# Altium PCB PrototypeV3.PcbDoc
Units mm, origin at the board's own origin, x right, y up, seen from the top; angles counter-clockwise.
Board outline 15.42 x 17.65 mm, 2 copper layers (Top Layer, Bottom Layer); 18 components, 39 nets, 67 pads, 5 vias.
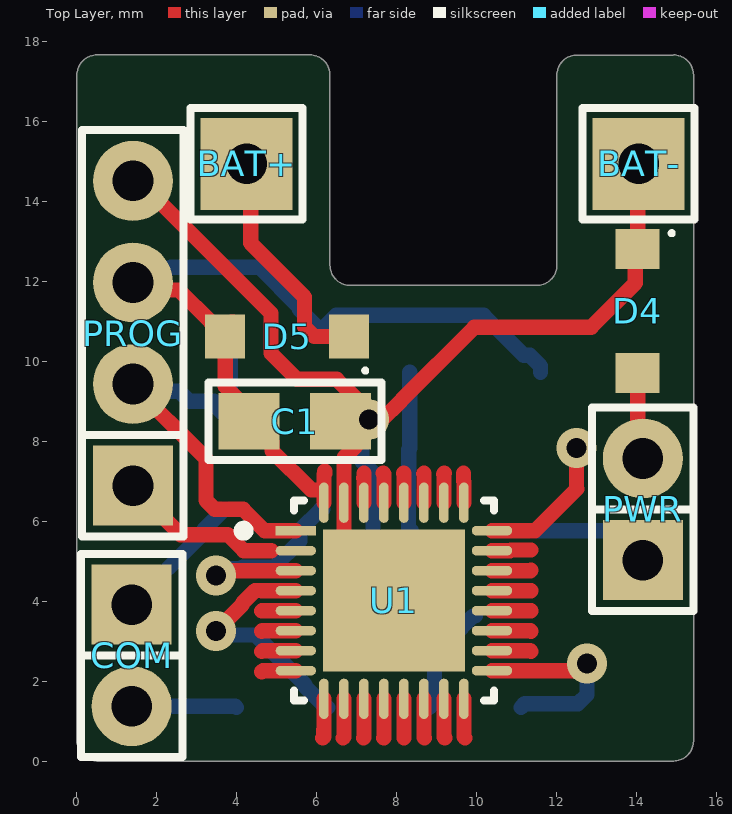
[diagram p0: Top Layer view]
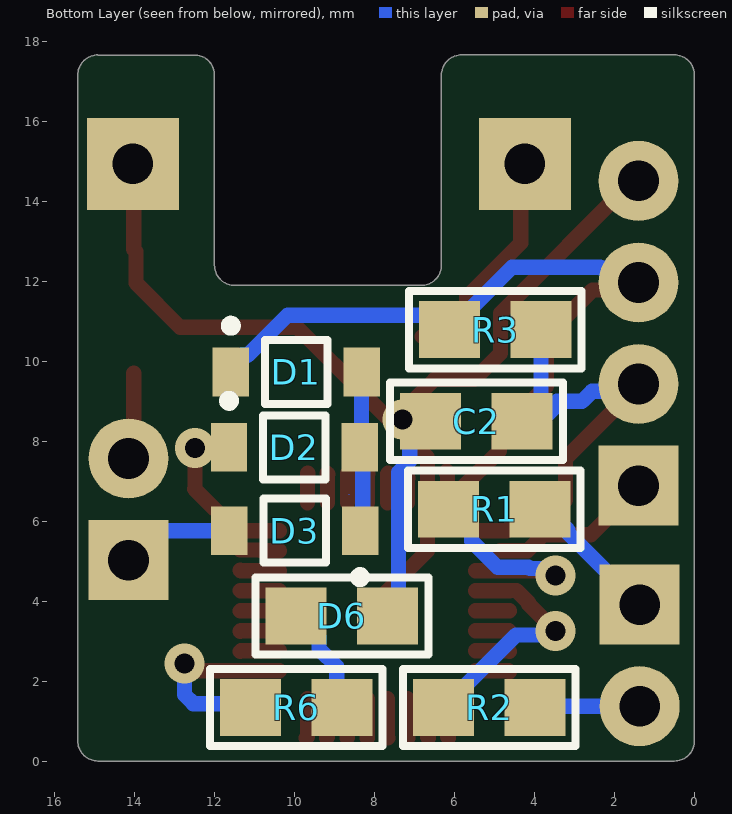
[diagram p1: Bottom Layer view, seen from below]
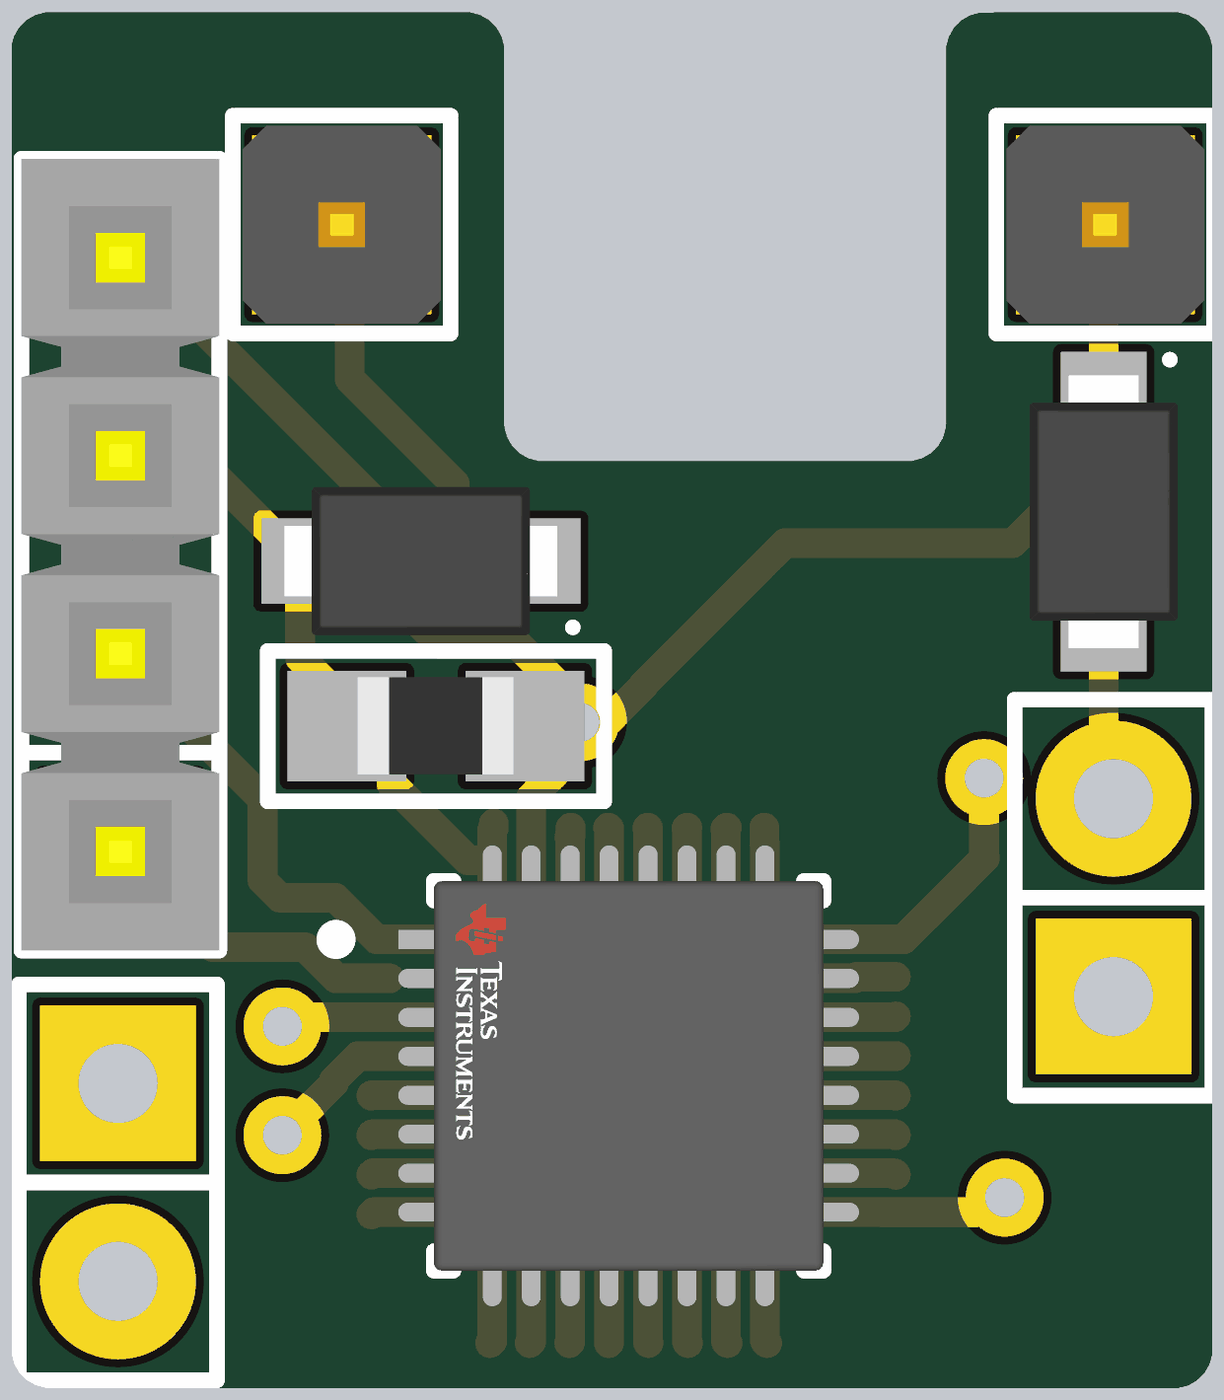
[diagram p2: 3D render of the assembled board from above, using the file's embedded part models]
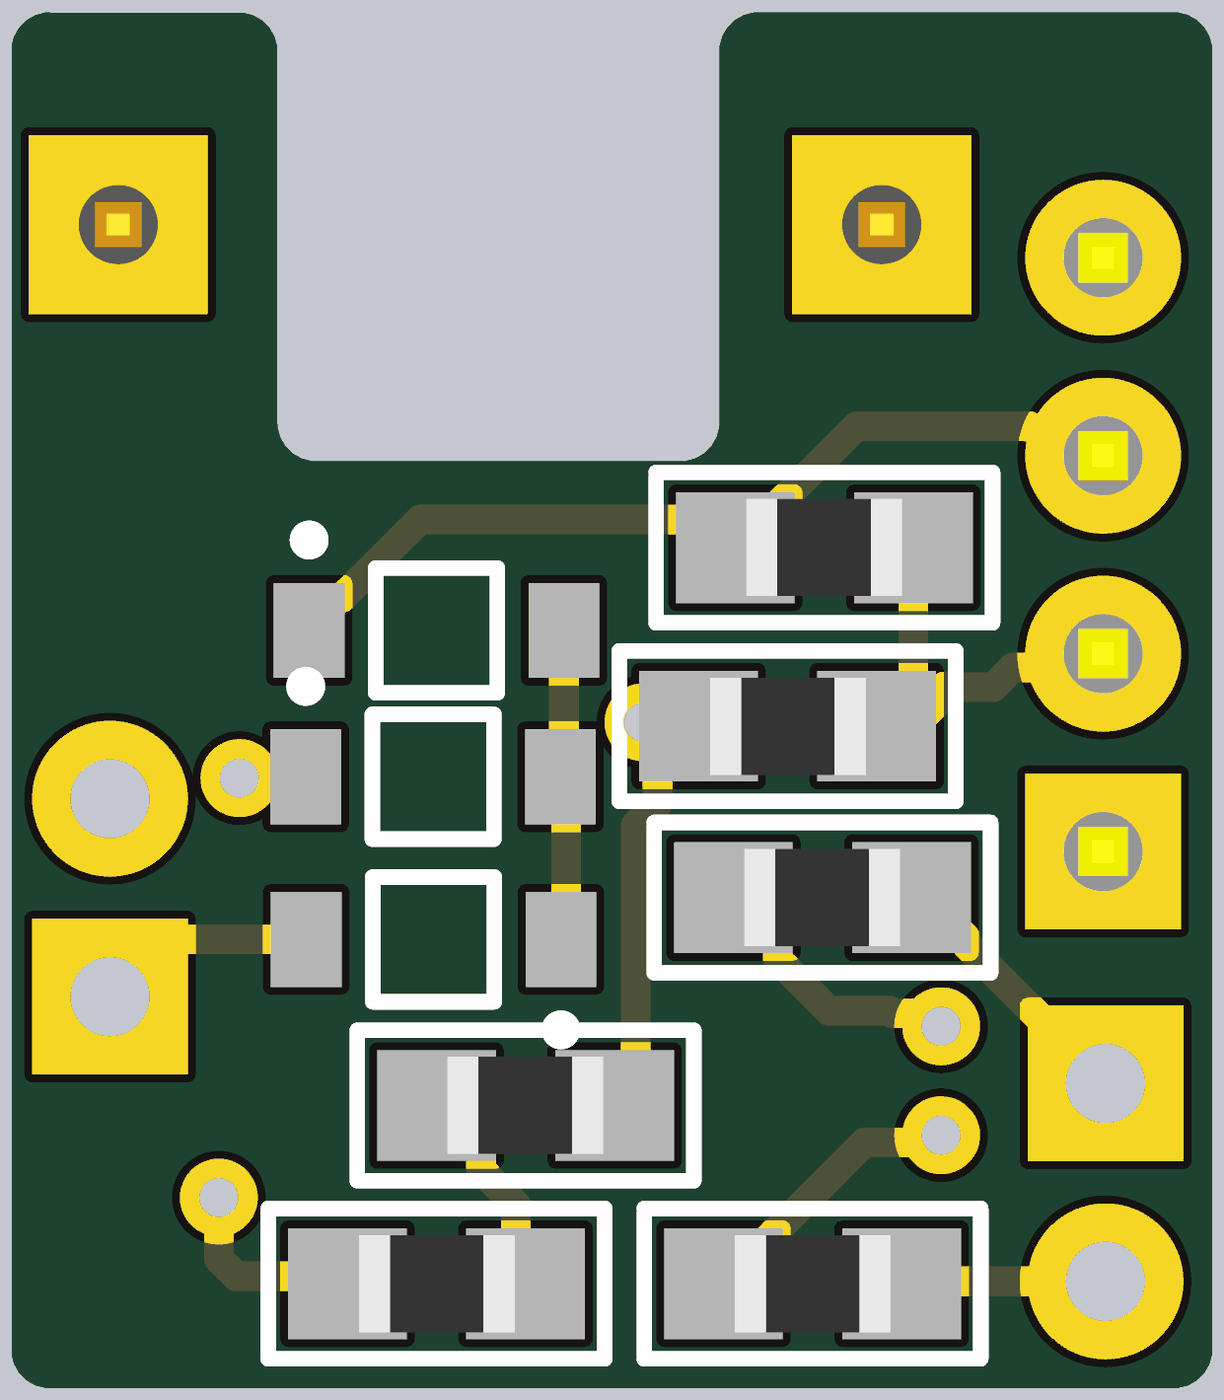
[diagram p3: 3D render of the assembled board from below, using the file's embedded part models]

## Layer stack, top to bottom
Top Solder: solder mask 0.0102, Solder Resist, Dk 3.5
Top Layer: signal copper 0.0356
Dielectric 1: dielectric 0.32, FR-4, Dk 4.8
Bottom Layer: signal copper 0.0356
Bottom Solder: solder mask 0.0102, Solder Resist, Dk 3.5

## Board outline
0,0.5 ccw(c0.5,0.5) 0.5,0 14.915,0 ccw(c14.915,0.5) 15.415,0.5 15.415,17.153 ccw(c14.915,17.153) 14.915,17.653 14.912,17.65 12.5,17.65 ccw(c12.5,17.15) 12,17.15 12,12.394 cw(c11.5,12.394) 11.5,11.894 6.826,11.894 cw(c6.826,12.394) 6.326,12.394 6.326,17.153 ccw(c5.826,17.153) 5.826,17.653 0.5,17.653 ccw(c0.5,17.153) 0,17.153

## Design rules (kind name [scope] priority, off if disabled: settings)
Clearance [All] p1: gap=0.1 ignorepadtopadclearanceinfootprint=TRUE
PolygonConnect [All] p1: connectstyle=Relief reliefconductorwidth=0.254 reliefentries=4 polygonreliefangle="90 Angle" airgapwidth=0.254
RoutingVias [All] p1: holewidth=0.711 width=1.27 viastyle="Through Hole" minholewidth=0.711 minwidth=1.27 maxholewidth=0.711 maxwidth=1.27
SolderMaskExpansion [All] p1: expansion=0.102 istentingtop=FALSE
Width [All] p1: maxlimit=0.5 minlimit=0.3 preferedwidth=0.5
30 further rules are at their usual default settings.

## Components (designator, comment, footprint, x,y, rotation, side; value= is the part's Value field where it differs from the comment)
BAT+ "TP" TPTH 4.242,14.929 r90 top
BAT- "TP" TPTH 14.042,14.929 r90 top
C1 "100nF" 0805 5.451,8.494 r0 top
C2 "4.7nF" 0805 5.451,8.494 r0 bottom
COM "CON2" SIP2 1.37,2.64 r270 top
D1 "1N4148WXHE3-TP" ONSC-SOD-123-2-425-04_V 9.957,9.722 r180 bottom
D2 "1N4148WXHE3-TP" ONSC-SOD-123-2-425-04_V 10.001,7.844 r180 bottom
D3 "1N4148WXHE3-TP" ONSC-SOD-123-2-425-04_V 9.995,5.757 r0 bottom
D4 "BAS100AS" SODFL350X110-2N 14.021,11.246 r270 top
D5 "BAS100AS" SODFL350X110-2N 5.258,10.611 r180 top
D6 "LED" 0805 8.814,3.626 r180 bottom
PROG "CON4" SIP4 1.401,10.694 r90 top
PWR "CON2" SIP2 14.148,6.293 r90 top
R1 "100" 0805 5.004,6.293 r180 bottom
R2 "100" 0805 5.131,1.34 r0 bottom
R3 "47k" 0805 4.979,10.784 r180 bottom
R6 "2k2" 0805 9.957,1.34 r0 bottom
U1 "MSP430FR2476TRHBR" FP-RHB0032E-IPC_A 7.925,4.007 r0 top

## Footprints (in the part's own frame and the unit in brackets; to place one, negate y for a bottom-side part, rotate by r counter-clockwise, add the part's x,y. Pads: shape width x height; smd on the part's side, far side on the other; paste and mask are expansions set on the pad)
0805 [mil] "Pasivo 0805"
  rect 60x56 smd: 1(-45,0) 2(45,0)
  silkscreen extent -85,-38 85,38, body extent -40,-24 39,25, height 15
FP-RHB0032E-IPC_A [mm]
  rect 1.01x0.242 smd paste+0 mask+0: 1(-2.451,1.75)
  rrect100% 1.01x0.242 smd paste+0 mask+0: 2(-2.451,1.25) 3(-2.451,0.75) 4(-2.451,0.25) 5(-2.451,-0.25) 6(-2.451,-0.75) 7(-2.451,-1.25) 8(-2.451,-1.75) 17(2.451,-1.75) 18(2.451,-1.25) 19(2.451,-0.75) 20(2.451,-0.25) 21(2.451,0.25) 22(2.451,0.75) 23(2.451,1.25) 24(2.451,1.75)
  rrect100% 0.242x1.01 smd paste+0 mask+0: 9(-1.75,-2.451) 10(-1.25,-2.451) 11(-0.75,-2.451) 12(-0.25,-2.451) 13(0.25,-2.451) 14(0.75,-2.451) 15(1.25,-2.451) 16(1.75,-2.451) 25(1.75,2.451) 26(1.25,2.451) 27(0.75,2.451) 28(0.25,2.451) 29(-0.25,2.451) 30(-0.75,2.451) 31(-1.25,2.451) 32(-1.75,2.451)
  rect 3.55x3.55 smd paste-1000 mask+0: 33(0,0)
  silkscreen extent -3.88,-2.5 2.5,2.5, body extent -3.46,-3.46 3.46,3.46, height 0.25
ONSC-SOD-123-2-425-04_V [mm] "SOD, 2-Leads, Body 2.69x1.6mm"
  rect 0.91x1.22 smd: 1(-1.635,0) 2(1.635,0)
  silkscreen extent -1.76,-0.8 0.78,1.28, body extent -1.35,-0.8 1.35,0.8, height 1.35
SIP2 [mm]
  rect 2x2 hole 1.016: 1(-1.27,0)
  round 2 hole 1.016: 2(1.27,0)
  silkscreen extent -2.54,-1.27 2.54,1.27
SIP4 [mm]
  rect 2x2 hole 1.016: 1(-3.81,0)
  round 2 hole 1.016: 2(-1.27,0) 3(1.27,0) 4(3.81,0)
  silkscreen extent -5.08,-1.27 5.08,1.27, body extent -5.08,-1.27 5.08,1.27, height 8.38
SODFL350X110-2N [mm] "SODFL, 2-Leads, Body 1.70x3.50mm, IPC Medium Density"
  rect 1x1.1 smd: 1(-1.55,0) 2(1.55,0)
  silkscreen extent -2,0.8 -1.9,0.9, body extent -1.75,-0.95 1.75,0.95, height 1.1
TPTH [mm]
  rect 2.3x2.3 hole 1.016: 1(0,0)
  silkscreen extent -1.4,-1.4 1.4,1.4, body extent -1.27,-1.27 1.27,1.27, height 6.04

## Part data
C1 C2: library part CAP
D1 D2 D3: library part CMP-0895-00001-2, "Switching Diode, 2-Pin SOD-123, Pb-Free, Tape and Reel", Manufacturer="On Semiconductor", PartNumber=MMSD4148T1G, ComponentLink1Description="Manufacturer URL", ComponentLink1URL=http://www.onsemi.com/, ComponentLink2Description=Datasheet, ComponentLink2URL=http://www.onsemi.com/pub_link/Collateral/MMSD4148T1-D.PDF, ComponentLink3Description="Package Specification", ComponentLink3URL=http://www.onsemi.com/pub_link/Collateral/425-04.PDF, Configuration=Single, DatasheetVersion="Rev. 11", IF Max (A)=0.2, Mounting Technology="Surface Mount", PackageDescription="2-Pin SOD, Body 1.6 x 2.69 mm", PackageReference=SOD-123-2-425-04, PackageVersion="Rev. G, 10/2009", Packing="Tape and Reel", RoHS=TRUE, trr Max (ns)=4
D4 D5: library part "DIODO SCHOTTKY"
R1 R2 R3 R6: library part RES
U1: library part CMP-04869-000099-1, "IC MCU 16BIT 64.5KB FRAM 32VQFN"

## Via types
v1: diameter 1, hole 0.5, Top Layer to Bottom Layer, 5 vias

## Nets (pads, with @x,y where several pads share a name; then routed paths per layer and width w, separated by ;. In a path a pad name is that pad's centre, name@x,y a point inside that pad or via, vN(x,y) a via of type N, cw(c..) or ccw(c..) an arc to the next point about the centre after c; other vN are vias at no path point)
Base_Detect: D2.1 U1.24 | length 3.6
  Top Layer w0.381: U1.24 11.453,5.757 12.497,6.801 ; 12.487,6.811 v1(12.487,7.827)
DVCC: C1.1 D1.1 D5.2 PROG.3 R3.1 U1.32 | length 21.5
  Top Layer w0.381: PROG.3@1.321,12.008 1.556,11.773 2.546,11.773 3.348,10.971 3.398,10.971 3.708,10.661 D5.2 3.708,9.367 C1.1@4.623,8.452 ; D5.2@3.856,10.971 D5.2@3.906,10.971 ; C1.1@3.975,8.701 C1.1@4.026,8.701 ; C1.1 4.358,8.494 4.879,7.974 4.879,7.754 5.86,6.773 6.105,6.773 U1.32@6.175,6.704 ; U1.32 U1.32@6.175,6.704 ; 6.194,7.244 6.194,7.187 6.175,7.168 U1.32@6.175,6.704
  Bottom Layer w0.381: PROG.3@1.759,12.008 1.321,12.008 1.63,12.318 2.327,12.318 2.353,12.344 4.562,12.344 5.55,11.356 5.55,11.305 6.071,10.784 R3.1 6.482,11.144 10.17,11.144 11.172,10.142 11.327,10.142 11.592,9.877 D1.1
DVSS: BAT-.1 C1.2 C2.2 D4.1 D6.2 PROG.4 U1.31 U1.33 | length 32.8
  Top Layer w0.381: PROG.4@1.321,14.548 1.497,14.548 4.851,11.194 4.851,10.194 5.501,9.544 6.494,9.544 6.972,9.066 6.972,9.015 C1.2@7.146,8.841 ; C1.2 7.594,8.494 8.115,9.015 8.115,9.024 9.936,10.844 12.857,10.844 13.96,11.948 13.96,12.736 D4.1 14.021,14.908 BAT-.1 ; U1.33@7.101,3.644 7.562,3.644 U1.33 6.675,5.257 U1.31 6.675,7.583 6.972,7.881 6.972,7.974 C1.2@7.146,8.148
  Bottom Layer w0.381: PROG.4@1.321,14.421 PROG.4@1.321,14.548 ; C2.2 6.837,8.251 6.842,8.251 7.119,7.974 7.119,7.501 7.401,7.219 7.401,3.896 D6.2 7.119,3.626 D6.2@7.101,3.644 ; C2.2@6.847,8.498 7.005,8.498 C2.2@7.101,8.594
  other v1: 7.301,8.544
GNDext: D4.2 PWR.2 | length 2.1
  Top Layer w0.381: PWR.2@14.021,7.563 D4.2
NC: U1.20 | length 1
  Top Layer w0.381: U1.20 11.35,3.757 11.354,3.753
NetBAT+_1: BAT+.1 D5.1 | length 5.9
  Top Layer w0.381: BAT+.1 4.343,14.828 4.343,12.952 5.693,11.602 5.693,10.852 5.934,10.611 D5.1
NetD1_2: D1.2 D2.2 D3.1 | length 4
  Bottom Layer w0.381: D1.2 8.322,7.817 8.295,7.79 8.295,6.859 8.291,6.856 8.291,5.826 D3.1
NetD6_1: D6.1 R6.1 | length 2.8
  Bottom Layer w0.381: R6.1 8.941,1.467 8.941,2.356 9.385,2.801 9.385,3.106 9.906,3.626 D6.1
P1.0: U1.7 | length 0.9
  Top Layer w0.381: 4.624,2.738 4.643,2.757 U1.7
P1.1: U1.8 | length 0.9
  Top Layer w0.381: 4.623,2.229 4.651,2.257 U1.8
P1.2: U1.9 | length 1
  Top Layer w0.381: 6.147,0.578 6.174,0.605 6.174,0.778 6.175,0.779 U1.9
P1.3: U1.10 | length 1
  Top Layer w0.381: 6.655,0.578 6.675,0.598 U1.10
P1.4: R1.1 U1.3 | length 5.6
  Top Layer w0.381: v1(3.48,4.642) 3.595,4.757 U1.3
  Bottom Layer w0.381: v1(3.48,4.642) 3.65,4.812 4.115,4.812 4.147,4.844 4.92,4.844 5.575,5.499 5.575,5.773 6.096,6.293 R1.1
P1.5: R2.2 U1.4 | length 6.1
  Top Layer w0.381: v1(3.48,3.245) 3.48,3.251 4.142,3.913 4.142,3.953 4.45,4.261 4.623,4.261 4.627,4.257 U1.4
  Bottom Layer w0.381: v1(3.48,3.245) 3.574,3.151 4.463,3.151 5.702,1.912 5.702,1.861 6.223,1.34 R2.2
P1.6: U1.5 | length 0.9
  Top Layer w0.381: 4.623,3.753 4.627,3.757 U1.5
P1.7: U1.6 | length 0.9
  Top Layer w0.381: 4.623,3.245 4.635,3.257 U1.6
P2.0: U1.29 | length 0.7
  Top Layer w0.381: 7.661,7.192 7.665,7.188 ; U1.29 7.675,7.178
P2.1: U1.30 | length 0.7
  Top Layer w0.381: 7.165,7.077 7.18,7.092 7.18,7.192 ; U1.30 7.175,7.067
P2.2: U1.11 | length 1
  Top Layer w0.381: 7.163,0.578 7.175,0.59 U1.11
P2.3: U1.14 | length 1
  Top Layer w0.381: U1.14 8.675,0.59 8.687,0.578
P2.4: R6.2 U1.17 | length 5
  Top Layer w0.381: U1.17 11.153,2.257 11.154,2.256 12.395,2.256 12.583,2.444 v1(12.751,2.444)
  Bottom Layer w0.381: R6.2 11.194,1.435 12.527,1.435 12.751,1.658 v1(12.751,2.444)
P2.5: U1.18 | length 1
  Top Layer w0.381: U1.18 11.334,2.757 11.354,2.737
P2.6: U1.19 | length 1
  Top Layer w0.381: U1.19 11.342,3.257 11.354,3.245
P2.7: U1.25 | length 0.7
  Top Layer w0.381: 9.665,6.992 9.666,6.993 9.666,7.192 ; U1.25 9.675,6.982
P3.0: U1.12 | length 1
  Top Layer w0.381: 7.671,0.578 7.675,0.582 U1.12
P3.1: U1.16 | length 1
  Top Layer w0.381: U1.16 9.675,0.606 9.703,0.578
P3.2: U1.27 | length 0.7
  Top Layer w0.381: 8.665,7.18 8.677,7.192 ; U1.27 8.675,7.17
P3.3: U1.13 | length 1
  Top Layer w0.381: U1.13 8.175,0.582 8.179,0.578
P3.4: U1.15 | length 1
  Top Layer w0.381: U1.15 9.175,0.598 9.194,0.579
P3.5: U1.26 | length 0.7
  Top Layer w0.381: 9.165,7.172 9.185,7.192 ; U1.26 9.175,7.162
P3.6: U1.28 | length 0.7
  Top Layer w0.381: 8.165,7.188 8.169,7.192 ; U1.28 8.175,7.178
P3.7: U1.21 | length 1
  Top Layer w0.381: U1.21 11.35,4.257 11.354,4.261
P4.0: U1.22 | length 1
  Top Layer w0.381: U1.22 11.342,4.757 11.354,4.769
P4.1: U1.23 | length 1
  Top Layer w0.381: U1.23 10.826,5.257 10.845,5.276 11.354,5.276
RSTn: C2.1 PROG.2 R3.2 U1.1 | length 12
  Top Layer w0.381: PROG.2@1.321,9.468 3.226,7.563 3.226,6.517 3.449,6.293 4.158,6.293 4.694,5.757 U1.1
  Bottom Layer w0.381: PROG.2@1.321,9.468 1.543,9.246 2.559,9.246 2.591,9.214 2.801,9.004 2.811,8.994 3.34,8.994 C2.1@3.836,8.498 ; 3.436,9.004 C2.1@3.836,8.604 ; R3.2 C2.1@3.836,8.604 ; C2.1@3.861,8.579 C2.1@3.836,8.604
RX: COM.2 R2.1 | length 2.6
  Bottom Layer w0.381: COM.2 3.958,1.37 R2.1
TEST: PROG.1 U1.2 | length 4.2
  Top Layer w0.381: PROG.1@1.321,6.928 2.591,5.658 3.772,5.658 4.173,5.257 4.857,5.257
TX: COM.1 R1.2 | length 3.4
  Bottom Layer w0.381: COM.1 3.162,5.702 3.162,5.773 3.683,6.293 R1.2@3.734,6.293
Vext: D3.2 PWR.1 | length 2.9
  Bottom Layer w0.381: D3.2@11.376,5.757 13.287,5.757 PWR.1@14.021,5.023

## Other copper
Bottom Layer:
  region: 8.636,6.664 8.636,6.663 8.638,6.663 8.638,6.664
  region: 8.585,6.728 8.588,6.728 8.588,6.729 8.585,6.729
  region: 8.583,6.732 8.583,6.735 8.582,6.735 8.582,6.732
  region: 12.845,10.266 12.845,10.265 12.849,10.265 12.849,10.268 12.847,10.268 12.847,10.266

## Silkscreen, mask and mechanical layers (free items; w line width, h text height)
Mechanical 1:
  lines w0.15: 0,0.5 ccw(c0.5,0.5) 0.5,0 ; 0,0.5 ccw(c0.5,0.5) 0.5,0 ; 0,0.5 0,17.153 ; 0,0.5 0,17.153 ; 0,17.153 cw(c0.5,17.153) 0.5,17.653 ; 0,17.153 cw(c0.5,17.153) 0.5,17.653 ; 0.5,0 14.915,0 ; 0.5,0 14.915,0 ; 0.5,17.653 5.826,17.653 ; 0.5,17.653 5.826,17.653 ; 5.826,17.653 cw(c5.826,17.153) 6.326,17.153 ; 5.826,17.653 cw(c5.826,17.153) 6.326,17.153 ; 6.326,12.394 ccw(c6.826,12.394) 6.826,11.894 ; 6.326,12.394 ccw(c6.826,12.394) 6.826,11.894 ; 6.326,12.394 6.326,17.153 ; 6.326,12.394 6.326,17.153 ; 6.826,11.894 11.5,11.894 ; 6.826,11.894 11.5,11.894 ; 11.5,11.894 ccw(c11.5,12.394) 12,12.394 ; 11.5,11.894 ccw(c11.5,12.394) 12,12.394 ; 12,12.394 12,17.15 ; 12,12.394 12,17.15 ; 12,17.15 cw(c12.5,17.15) 12.5,17.65 ; 12,17.15 cw(c12.5,17.15) 12.5,17.65 ; 12.5,17.65 14.912,17.65 ; 12.5,17.65 14.912,17.65 ; 14.912,17.65 14.915,17.653 ; 14.912,17.65 14.915,17.653 ; 14.915,0 ccw(c14.915,0.5) 15.415,0.5 ; 14.915,0 ccw(c14.915,0.5) 15.415,0.5 ; 14.915,17.653 cw(c14.915,17.153) 15.415,17.153 ; 14.915,17.653 cw(c14.915,17.153) 15.415,17.153 ; 15.415,0.5 15.415,17.153 ; 15.415,0.5 15.415,17.153